# Altium PCB LM2596_PCB.PcbDoc
Units mil, origin at the board's own origin, x right, y up, seen from the top; angles counter-clockwise.
Board outline 1385 x 1160 mil, 2 copper layers (Top Layer, Bottom Layer); 8 components, 6 nets, 25 pads, 0 vias.
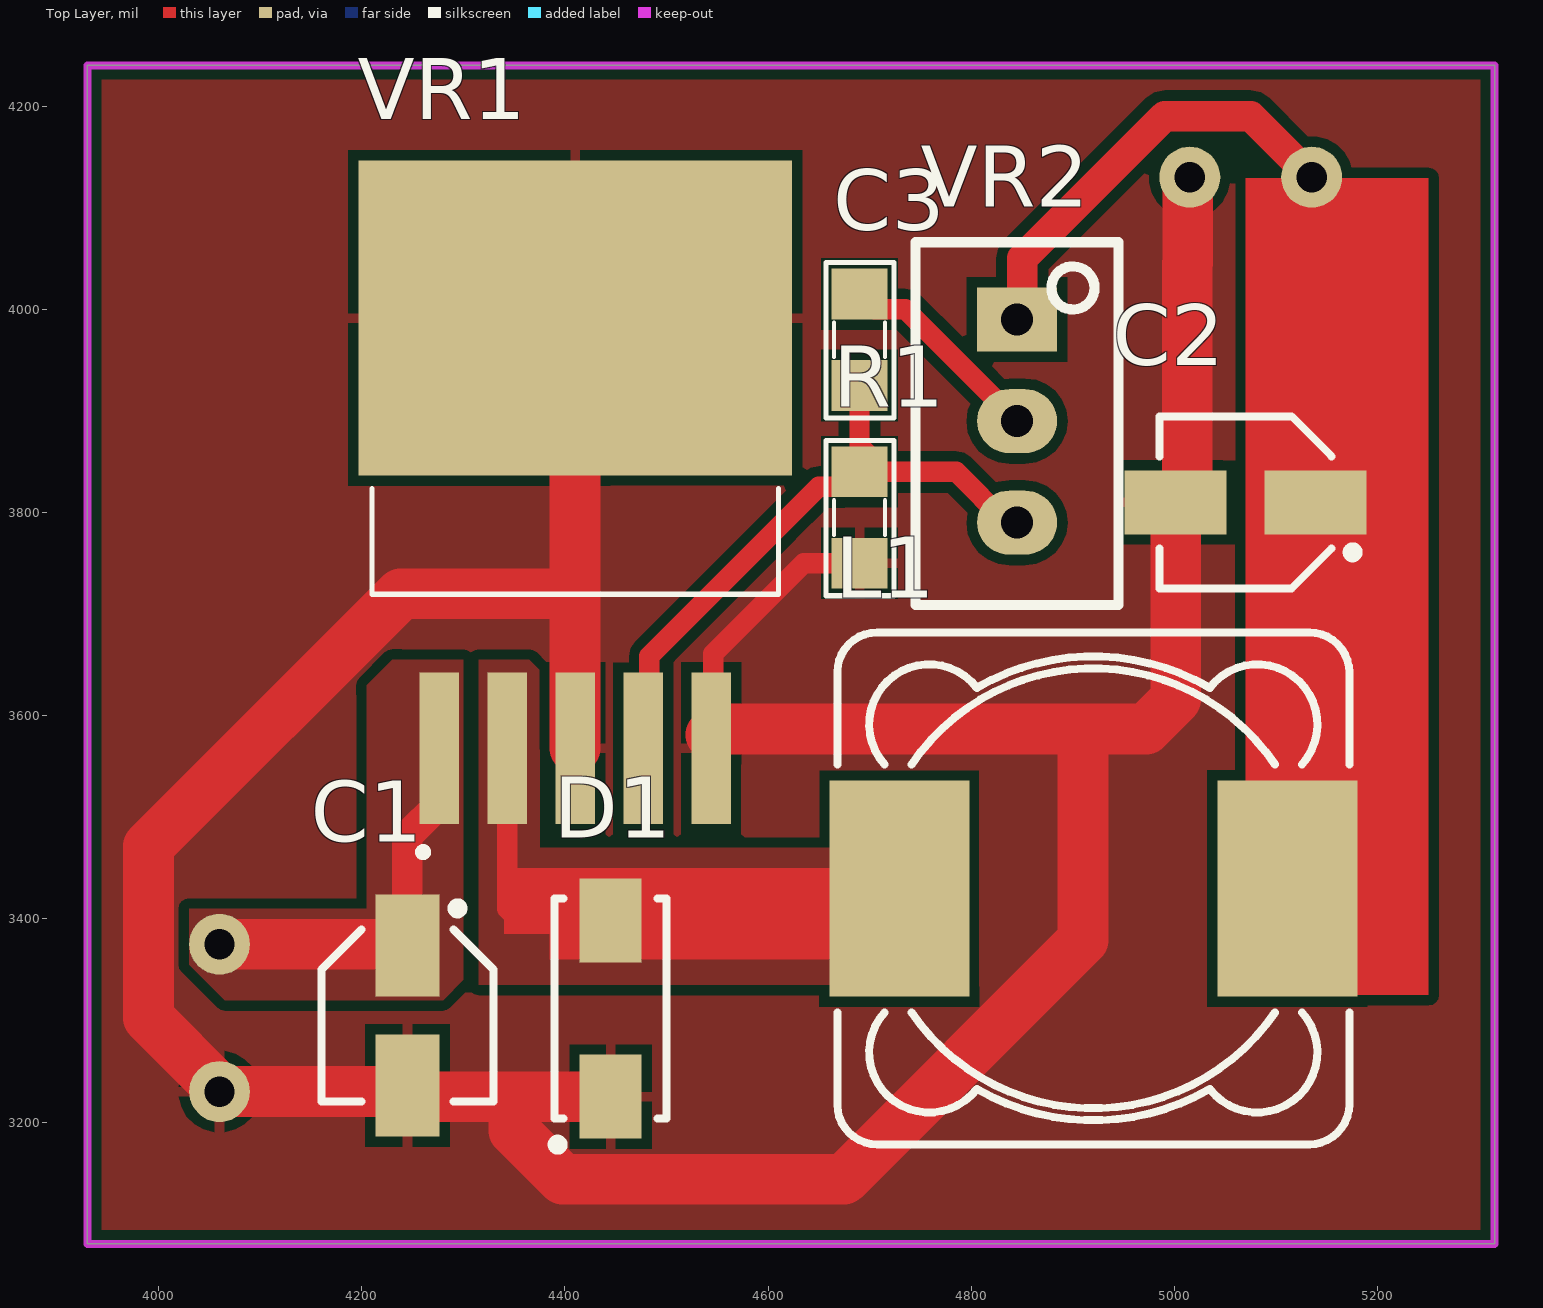
[diagram p0: Top Layer view]
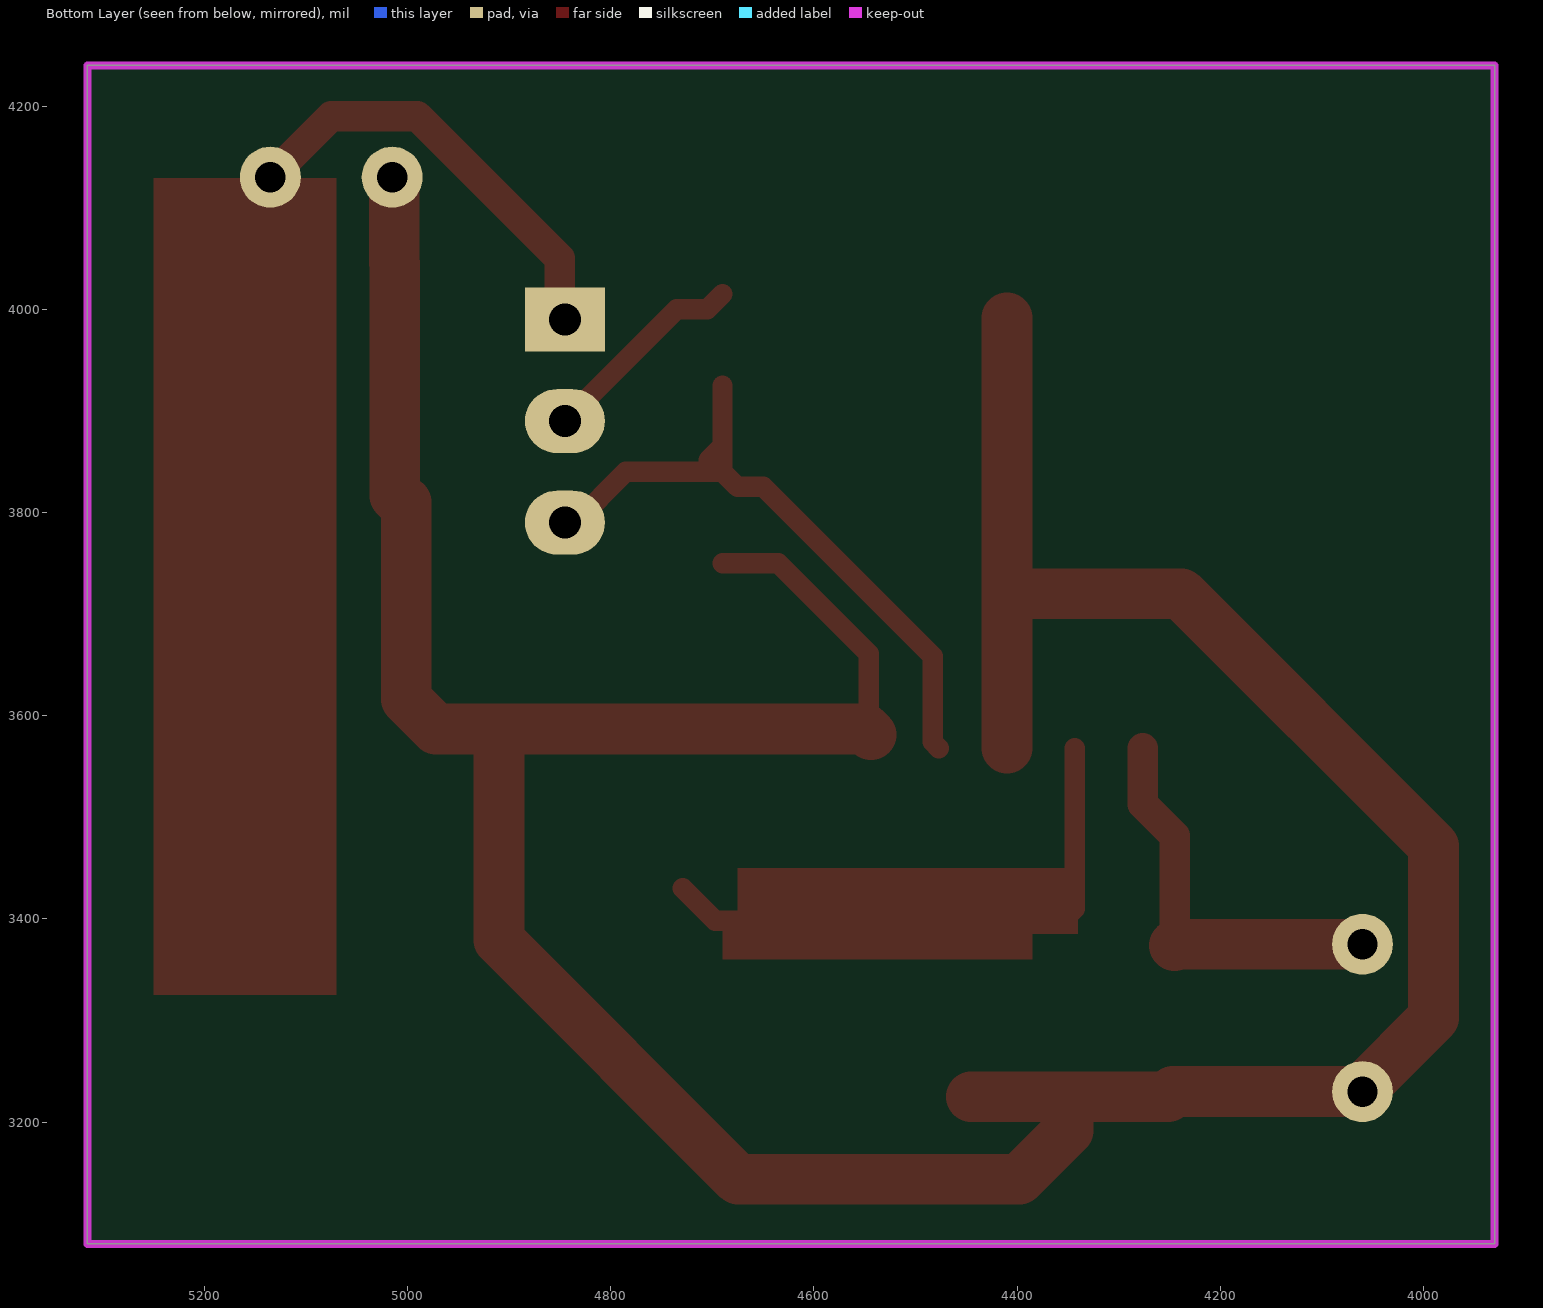
[diagram p1: Bottom Layer view, seen from below]
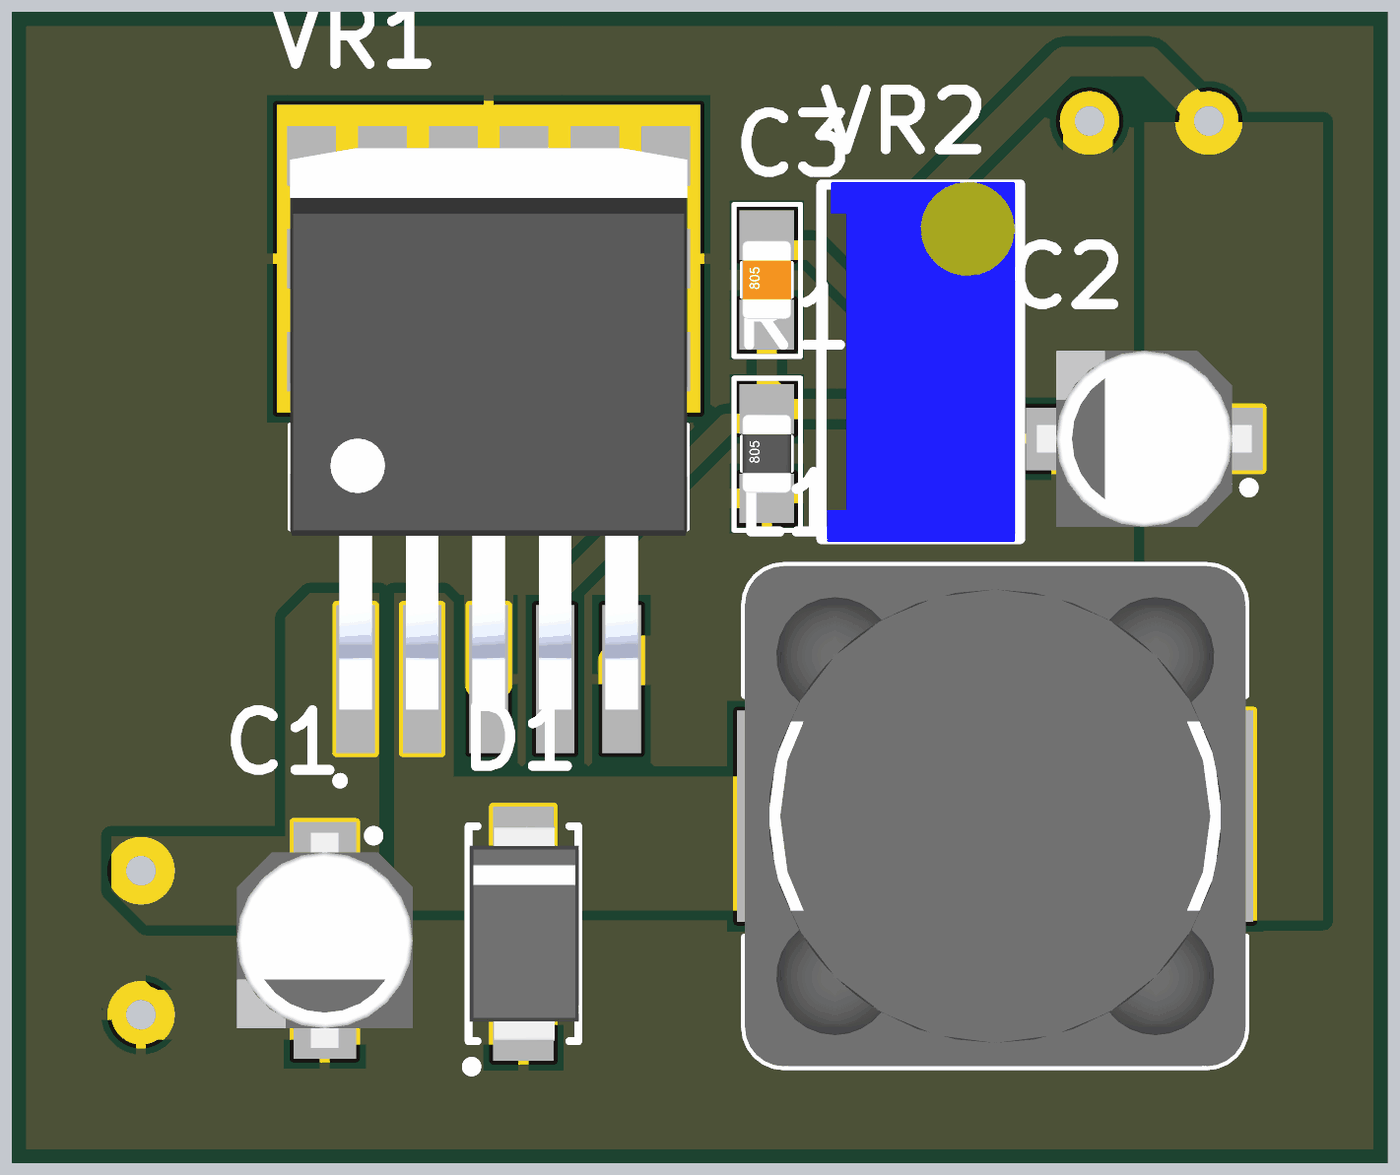
[diagram p2: 3D render of the assembled board from above, using the file's embedded part models]

## Layer stack, top to bottom
Top Solder: solder mask 0.4, Solder Resist, Dk 3.5
Top Layer: signal copper 1.4
Dielectric 1: dielectric 12.6, FR-4, Dk 4.8
Bottom Layer: signal copper 1.4
Bottom Solder: solder mask 0.4, Solder Resist, Dk 3.5

## Board outline
3930,3080 3930,4240 5315,4240 5315,3080

## Design rules (kind name [scope] priority, off if disabled: settings)
Clearance [All] p1: gap=10 ignorepadtopadclearanceinfootprint=FALSE
PolygonConnect PolygonConnect_8 [All vs IsNamedPolygon('GND_L01_P005')] p1: thpad.connectstyle=Relief thpad.reliefconductorwidth=10 thpad.reliefentries=4 thpad.polygonreliefangle="90 Angle" thpad.airgapwidth=10 smdpad.connectstyle=Relief smdpad.reliefconductorwidth=10 smdpad.reliefentries=4 smdpad.polygonreliefangle="90 Angle" smdpad.airgapwidth=10 via.connectstyle=Direct via.reliefconductorwidth=10 via.reliefentries=4 via.polygonreliefangle="90 Angle" via.airgapwidth=10
PolygonConnect PolygonConnect_7 [All vs IsNamedPolygon('NONET_L01_P006')] p2: thpad.connectstyle=Relief thpad.reliefconductorwidth=10 thpad.reliefentries=4 thpad.polygonreliefangle="90 Angle" thpad.airgapwidth=10 smdpad.connectstyle=Relief smdpad.reliefconductorwidth=10 smdpad.reliefentries=4 smdpad.polygonreliefangle="90 Angle" smdpad.airgapwidth=10 via.connectstyle=Direct via.reliefconductorwidth=10 via.reliefentries=4 via.polygonreliefangle="90 Angle" via.airgapwidth=10
PolygonConnect PolygonConnect_6 [All vs IsNamedPolygon('GND_L01_P005')] p3: thpad.connectstyle=Relief thpad.reliefconductorwidth=10 thpad.reliefentries=4 thpad.polygonreliefangle="90 Angle" thpad.airgapwidth=10 smdpad.connectstyle=Relief smdpad.reliefconductorwidth=10 smdpad.reliefentries=4 smdpad.polygonreliefangle="90 Angle" smdpad.airgapwidth=10 via.connectstyle=Direct via.reliefconductorwidth=10 via.reliefentries=4 via.polygonreliefangle="90 Angle" via.airgapwidth=10
PolygonConnect PolygonConnect_5 [All vs IsNamedPolygon('GND_L01_P000')] p4: connectstyle=Relief reliefconductorwidth=10 reliefentries=4 polygonreliefangle="90 Angle" airgapwidth=10
PolygonConnect PolygonConnect_4 [All vs IsNamedPolygon('NETD1_2_L01_P004')] p5: thpad.connectstyle=Direct thpad.reliefconductorwidth=10 thpad.reliefentries=4 thpad.polygonreliefangle="90 Angle" thpad.airgapwidth=10 smdpad.connectstyle=Direct smdpad.reliefconductorwidth=10 smdpad.reliefentries=4 smdpad.polygonreliefangle="90 Angle" smdpad.airgapwidth=10 via.connectstyle=Relief via.reliefconductorwidth=10 via.reliefentries=4 via.polygonreliefangle="90 Angle" via.airgapwidth=10
PolygonConnect PolygonConnect_3 [All vs IsNamedPolygon('V_IN_L01_P002')] p6: thpad.connectstyle=Direct thpad.reliefconductorwidth=10 thpad.reliefentries=4 thpad.polygonreliefangle="90 Angle" thpad.airgapwidth=10 smdpad.connectstyle=Direct smdpad.reliefconductorwidth=10 smdpad.reliefentries=4 smdpad.polygonreliefangle="90 Angle" smdpad.airgapwidth=10 via.connectstyle=Relief via.reliefconductorwidth=10 via.reliefentries=4 via.polygonreliefangle="90 Angle" via.airgapwidth=10
PolygonConnect PolygonConnect_2 [All vs IsNamedPolygon('NONET_L01_P001')] p7: thpad.connectstyle=Direct thpad.reliefconductorwidth=10 thpad.reliefentries=4 thpad.polygonreliefangle="90 Angle" thpad.airgapwidth=10 smdpad.connectstyle=Direct smdpad.reliefconductorwidth=10 smdpad.reliefentries=4 smdpad.polygonreliefangle="90 Angle" smdpad.airgapwidth=10 via.connectstyle=Relief via.reliefconductorwidth=10 via.reliefentries=4 via.polygonreliefangle="90 Angle" via.airgapwidth=10
PolygonConnect PolygonConnect_1 [All vs IsNamedPolygon('GND_L01_P000')] p8: thpad.connectstyle=Direct thpad.reliefconductorwidth=10 thpad.reliefentries=4 thpad.polygonreliefangle="90 Angle" thpad.airgapwidth=10 smdpad.connectstyle=Direct smdpad.reliefconductorwidth=10 smdpad.reliefentries=4 smdpad.polygonreliefangle="90 Angle" smdpad.airgapwidth=10 via.connectstyle=Relief via.reliefconductorwidth=10 via.reliefentries=4 via.polygonreliefangle="90 Angle" via.airgapwidth=10
PolygonConnect [All] p9: connectstyle=Relief reliefconductorwidth=10 reliefentries=4 polygonreliefangle="90 Angle" airgapwidth=10
RoomDefinition Sheet1_LM2596 [InComponentClass('Sheet1_LM2596')] p1: confinementstyle=ConfineIn formatcopy=TRUE lockcomponents=FALSE outline 7170.44,1340 9685.44,1340 9685.44,2155 7170.44,2155
RoutingVias [All] p1: holewidth=0.8 width=1.5 viastyle="Through Hole" minholewidth=0.8 minwidth=1.5 maxholewidth=0.8 maxwidth=1.5
SolderMaskExpansion [All] p1: expansion=4 istentingtop=FALSE
Width [All] p1: maxlimit=50 minlimit=20 preferedwidth=30 minimp=50.000000 maximp=50.000000 favimp=50.000000
30 further rules are at their usual default settings.

## Components (designator, comment, footprint, x,y, rotation, side; value= is the part's Value field where it differs from the comment)
C1 "Cap Pol SMD" "CAP ALU SIZE B" 4245,3305 r270 top value=470uF
C2 "Cap Pol SMD" "CAP ALU SIZE B" 5070,3810 r180 top value=220uF
C3 "Cap Non-Pol SMD" CAP-SM-0805 4690,3925 r90 top value=100pF
D1 "D Schottky" SS34 4445,3311.61 r90 top
L1 "Inductor" "INDUCTOR 12.5x12.5" 4920,3430 r0 top value=68uH
R1 "RESISTOR SMD" RES-SM-0805 4690,3750 r90 top value=1K
VR1 "LM2596S-5.0" TO170P1524X483-6N 4410,3820 r90 top
VR2 "10K" "VARISTOR 2" 4845,3890 r270 top value="VR 10K"

## Footprints (in the part's own frame and the unit in brackets; to place one, negate y for a bottom-side part, rotate by r counter-clockwise, add the part's x,y. Pads: shape width x height; smd on the part's side, far side on the other; paste and mask are expansions set on the pad)
"CAP ALU SIZE B" [mm] "Capacitor, Aluminium Electrolytric, 4.3mm L X 4.3mm W X 5.4mm H, IPC Medium Density"
  rect 2.55x1.6 smd: 1(-1.75,0) 2(1.75,0)
  silkscreen extent -2.8,-2.15 2.15,2.15, body extent -2.75,-2.25 2.75,2.25, height 5.7
CAP-SM-0805 [mil]
  rect 50x55 smd: 1(0,0) 2(90,0)
  silkscreen extent -32,-34 121,33, body extent 6,-25 84,25, height 31
"INDUCTOR 12.5x12.5" [mm] "SMD Inductor  Body Width 12.5mm Body Lenght 12.5mm Height 8mm"
  rect 3.5x5.4 smd: 1(-4.85,0) 2(4.85,0)
  silkscreen extent -6.4,-6.4 6.4,6.4, body extent -6.4,-6.4 6.4,6.4, height 8
RES-SM-0805 [mil]
  rect 50x55 smd: 1(0,0) 2(90,0)
  silkscreen extent -32,-34 121,33, body extent 6,-25 84,25, height 31
SS34 [mm] "DO-214-AC/SMA Molded Diode, Body 5.3x2.6mm, IPC Medium Density"
  rect 2.1x1.55 smd: 1(-2.2,0) 2(2.2,0)
  silkscreen extent -3.52,-1.4 2.75,1.45, body extent -2.75,-1.42 2.75,1.38, height 2.3
TO170P1524X483-6N [mm]
  rect 3.79x0.99 smd: 1(-6.4,3.4) 2(-6.4,1.7) 3(-6.4,0) 4(-6.4,-1.7) 5(-6.4,-3.4)
  rect 7.88x10.84 smd paste-6: 6(4.35,0)
  silkscreen extent -9.1,-5.08 0.09,5.08, body extent -7.18,-5.08 7.18,5.08, height 4.65
"VARISTOR 2" [mm] "Resistor Variable"
  rect 1.6x2 hole 0.8: 1(-2.54,0)
  oval 1.6x2 hole 0.8: 2(0,0) 3(2.54,0)
  silkscreen extent -4.47,-2.54 4.6,2.54, body extent -4.54,-2.4 4.66,2.4, height 12.02

## Part data
C1 C2: "Polarized Capacitor (Radial)"
C3: "Capacitor"
D1: "Schottky Diode", Code_JEDEC=DO-214-AA, LatestRevisionDate=17-Jul-2002, LatestRevisionNote="Re-released for DXP Platform.", PackageDescription="DO-214-AA/SMB; 2 C-Bend Leads; Body 5.3 x 3.6 mm, inc. leads (LxW)", PackageReference=SMB, Published=8-Jun-2000, Publisher="Altium Limited"
R1: "Resistor"
VR1: "SIMPLE SWITCHER&reg; 4.5V to 40V, 3A Low Component Count Step-Down Regulator", Package="TO-263-5 Texas Instruments", Availability="In Stock", Check_prices=https://www.snapeda.com/parts/LM2596S-5.0/NOPB/Texas+Instruments/view-part/?ref=eda, MF="Texas Instruments", MP=LM2596S-5.0/NOPB, Price=None, Purchase-URL=https://pricing.snapeda.com/search/part/LM2596S-5.0/NOPB/?ref=eda, SnapEDA_Link=https://www.snapeda.com/parts/LM2596S-5.0/NOPB/Texas+Instruments/view-part/?ref=snap
VR2: library part "Var Resistor", "Var Resistor"

## Free pads (board coordinates)
  round 60 hole 30: 1(4060,3375) 2(4060,3230) 3(5135,4130) 4(5015,4130)

## Nets (pads, with @x,y where several pads share a name; then routed paths per layer and width w, separated by ;. In a path a pad name is that pad's centre, name@x,y a point inside that pad or via, vN(x,y) a via of type N, cw(c..) or ccw(c..) an arc to the next point about the centre after c; other vN are vias at no path point)
GND: C1.2 C2.2 D1.1 pad.2 pad.4 R1.1 VR1.3 VR1.5 VR1.6 | length 3791.1
  Top Layer w20: VR1.5 4543.86,3581.3 4545.92,3583.36 4545.92,3660.92 4635,3750 R1.1
  Top Layer w50: VR1.3 4410,3720 ; VR1.6 4410,3720 ; D1.1 4350,3225 ; VR1.5@4543.86,3581.3 4549.37,3586.81 4910,3586.81 ; pad.4 5013.09,4128.09 5013.09,4045.59 5012.5,4045 5012.5,3816.5 5006,3810 C2.2 5001.1,3616.1 4971.81,3586.81 4910,3586.81 ; 4350,3225 4251.5,3225 4246.5,3230 pad.2 4060,3232.71 3990,3302.71 3990,3471.57 4238.43,3720 4410,3720 ; 4350,3225 4350,3191.58 4397.92,3143.66 4674.48,3143.66 4910,3379.18 4910,3586.81
NetC3_1: C3.1 R1.2 VR1.4 VR2.3 | length 666.5
  Top Layer w20: VR1.4 4483.04,3574.14 4483.04,3658.44 4649.83,3825.24 4675.24,3825.24 R1.2 ; C3.1 4690,3865 ; VR2.3 4835,3790 4785,3840 R1.2@4703.75,3840 ; R1.2 R1.2@4703.75,3840 ; R1.2 4690,3865 ; 4690,3865 4703.75,3851.25 R1.2@4703.75,3840
NetC3_2: C3.2 VR2.2 | length 206.8
  Top Layer w20: C3.2 4705,4000 4735,4000 VR2.2
NetD1_2: D1.2 L1.1 VR1.2 | length 562.1
  Top Layer w20: VR1.2 4343.07,3409.94 4354.79,3398.23 4697.28,3398.23 L1.1
V_in: C1.1 pad.1 VR1.1 | length 392.5
  Top Layer w30: C1.1 4245,3481.77 4276.14,3512.91 VR1.1
  Top Layer w50: pad.1 4243.9,3375 C1.1
V_out: C2.1 L1.2 pad.3 VR2.1 | length 1162
  Top Layer w30: VR2.1 4850.15,3995.15 4850.15,4050 4990.15,4190 5075,4190 pad.3
  Top Layer w50: L1.2 5124.92,3443.98 5124.92,3803.5 5131.42,3810 5143.5,3810 5150,3816.5 5150,4015.99 5136.91,4029.08 5136.91,4128.09 pad.3 pad.3@5132.29,4130

## Polygon pours and split planes (outlines as drawn)
GND on Top Layer "GND_L01_P006" (solid, pour order 6): 3930,3080 3930,4240 5315,4240 5315,3080
GND on Top Layer "GND_L01_P005" (solid, remove dead copper, pour order 5): 3930,3080 3930,4240 5315,4240 5315,3080
NetD1_2 on Top Layer "NETD1_2_L01_P004" (solid, pour order 4): 4315,3655 4365,3655 4375,3645 4375,3470 4790,3470 4790,3355 4770,3335 4315,3335 4315,3330
V_in on Top Layer "V_IN_L01_P002" (solid, pour order 2): 4030,3410 4030,3355 4065,3320 4280,3320 4300,3340 4300,3655 4230,3655 4205,3630 4205,3410

## Keep-outs
Keep-Out Layer:
  the board outline again, w7.87

## Other copper
Top Layer:
  rectangle net NetD1_2: 4385,3360 4690,3395
  rectangle net NetD1_2: 4340,3385 4675,3450
  rectangle net V_out: 5070,3325 5250,4129.04
  rectangle net V_out: 5135.16,3495 5180,3810